# Altium PCB PCB V1.0_2024-01-11.pcbdoc
Units mm, origin at the board's own origin, x right, y up, seen from the top; angles counter-clockwise.
Board outline 120.66 x 89.41 mm, 2 copper layers (Top Layer, Bottom Layer); 58 components, 46 nets, 213 pads, 104 vias.
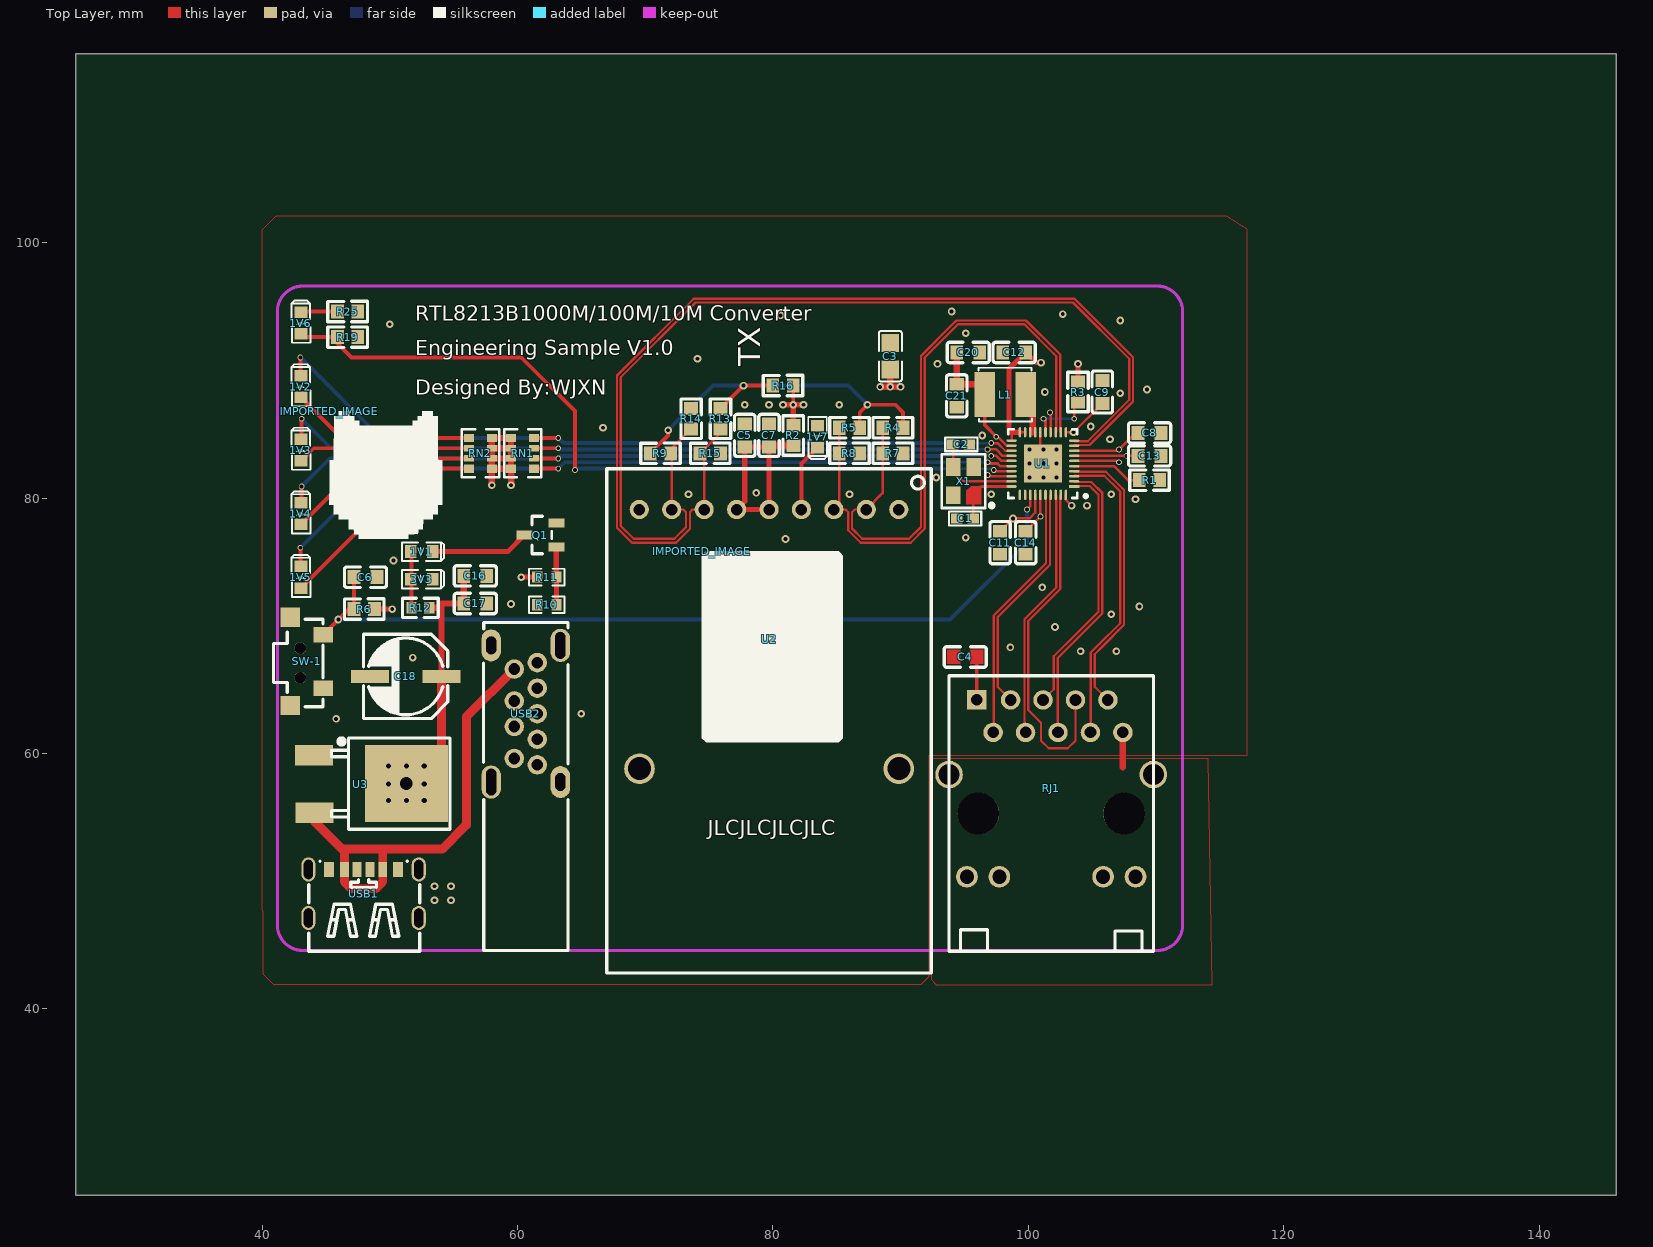
[diagram p0: Top Layer view]
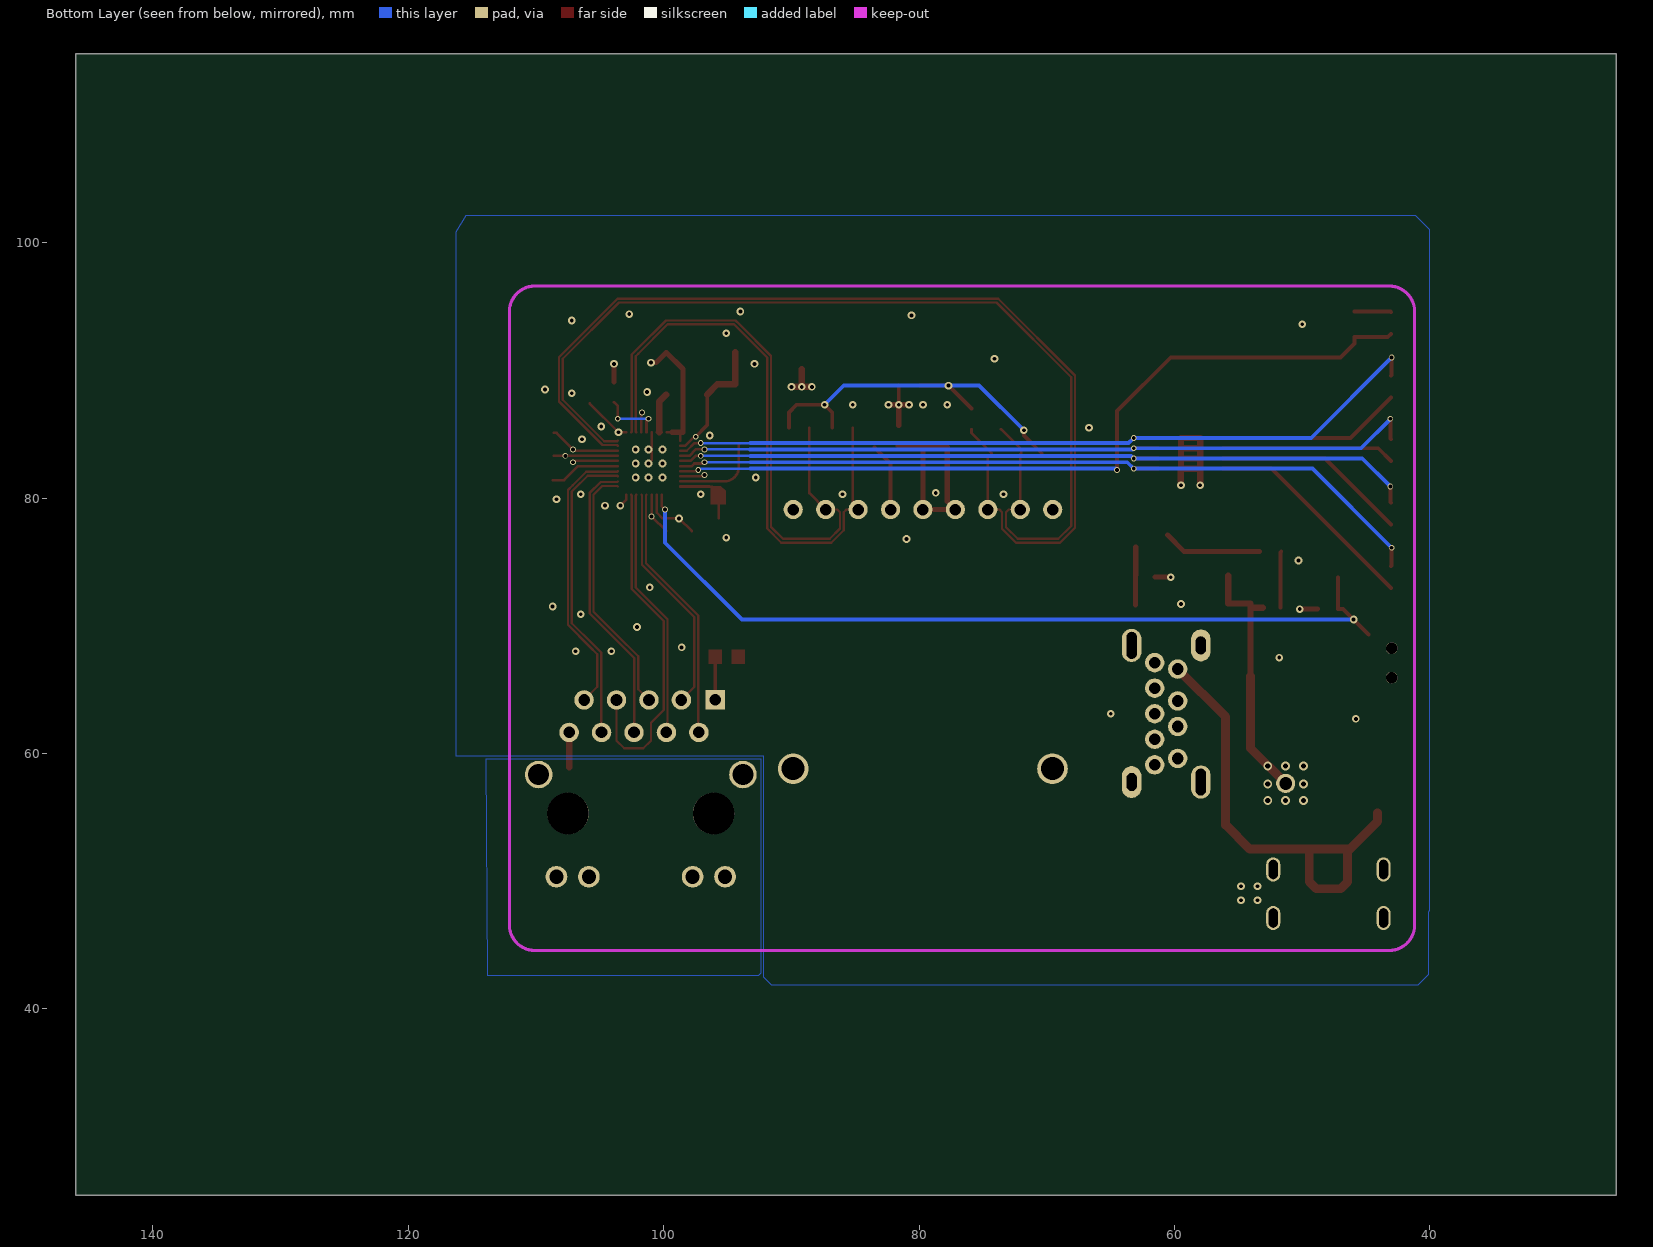
[diagram p1: Bottom Layer view, seen from below]

## Layer stack, top to bottom
Top Layer: signal copper (thickness not stored)
Dielectric: dielectric 0.32, FR-4, Dk 4.8
Bottom Layer: signal copper (thickness not stored)

## Board outline
146.057,25.4 25.4,25.4 25.4,114.812 146.057,114.812

## Components (designator, comment, footprint, x,y, rotation, side; value= is the part's Value field where it differs from the comment)
1V1 "LED-0603_R" LED0603_RED 52.5,75.812 r0 top
1V2 "LED-0603_R" LED0603_RED 43.05,88.737 r90 top
1V3 "LED-0603_R" LED0603_RED 43.05,83.762 r90 top
1V4 "LED-0603_R" LED0603_RED 43.05,78.787 r90 top
1V5 "LED-0603_R" LED0603_RED 43.05,73.812 r90 top
1V6 "LED-0603_R" LED0603_RED 43.05,93.712 r90 top
1V7 "LED-0603_R" LED0603_RED 83.5,84.812 r270 top
3V3 "LED-0603_R" LED0603_RED 52.5,73.653 r0 top
C1 "18PF" C0402 95.7,78.412 r180 top
C2 "18PF" C0402 95.4,84.212 r180 top
C3 "10u" C0805 89.2,91.112 r270 top
C4 "10nf" C0603#1 95.069,67.564 r0 top
C5 "0.1u" C0603#2 77.8,84.912 r270 top
C6 "0.1u" C0603#2 48.1,73.812 r180 top
C7 "10n" C0603#2 79.7,84.912 r270 top
C8 "100n" C0603#2 109.5,85.112 r180 top
C9 "100n" C0603#2 105.8,88.312 r270 top
C11 "100n" C0603#2 97.8,76.512 r90 top
C12 "100n" C0603#2 98.9,91.412 r0 top
C13 "100n" C0603#2 109.5,83.312 r180 top
C14 "100n" C0603#2 99.8,76.512 r90 top
C16 "0.1u" C0603#2 56.7,73.912 r180 top
C17 "10n" C0603#2 56.7,71.753 r180 top
C18 "100uF" CAP-SMD_BD6.3-L6.6-W6.6-FD 51.254,66.04 r180 top
C20 "10n" C0603#2 95.3,91.412 r180 top
C21 "0.1u" C0603#2 94.4,88.012 r90 top
IMPORTED_IMAGE "IMPORTED_IMAGE" IMPORTED_IMAGE 45.278,86.813 r0 top
IMPORTED_IMAGE "IMPORTED_IMAGE" IMPORTED_IMAGE 74.448,75.845 r0 top
L1 "2.2uH" IND-SMD_L4.0-W4.0 98.2,88.112 r180 top
Q1 "SI2302" SOT-23(SOT-23-3) 61.792,77.114 r90 top
R1 "2.5k" R0603#1 109.5,81.412 r180 top
R2 "0R" R0603#1 81.6,84.912 r270 top
R3 "4.7k" R0603#1 103.9,88.312 r90 top
R4 "82R" R0603#1 89.4,85.512 r0 top
R5 "82R" R0603#1 86,85.512 r0 top
R6 "4.7k" R0603#1 48,71.312 r0 top
R7 "130R" R0603#1 89.4,83.512 r180 top
R8 "130R" R0603#1 86,83.512 r180 top
R9 "82R" R0603#1 71.2,83.512 r180 top
R10 "10K" R0603#2 62.3,71.653 r0 top
R11 "1K" R0603#2 62.3,73.812 r0 top
R12 "1K" R0603#3 52.4,71.412 r180 top
R13 "82R" R0603#1 75.9,86.212 r90 top
R14 "130R" R0603#1 73.6,86.212 r270 top
R15 "130R" R0603#1 75.1,83.512 r180 top
R16 "0r" R0603#1 80.8,88.812 r0 top
R19 "4.7k" R0603#1 46.7,92.612 r180 top
R25 "470R" R0603#1 46.7,94.612 r180 top
RJ1 "HR911130A" RJ45-TH_HR911130A 101.8,57.277 r180 top
RN1 "4.7k" RES-ARRAY-SMD_0603-8P-L3.2-W1.6-BL 60.4,83.512 r270 top
RN2 "470R" RES-ARRAY-SMD_0603-8P-L3.2-W1.6-BL 57.1,83.512 r270 top
SW-1 "TS-1101VS-C-A-A" KEY-SMD_4P-L7.8-W2.8-P4.20-EH 43.5,67.212 r90 top
U1 "RTL8213B" QFN40_5*5*0.4 103.6,80.912 r180 top
U2 "1*9-SC" 1*9-SC 79.702,68.961 r90 top
U3 "UZ1084G-3.3V-TN3-R" TO-252-3_L6.5-W5.8-P4.58-TL 47.7,57.612 r0 top
USB1 "TYPE-C 6P" TYPE-C-SMD_TYPE-C-6P 47.952,49.022 r0 top
USB2 "U231-091N-4BLCC14-F-5" USB3.0-A-TH_U231-091N-4BLCC14-S-5 60.652,63.119 r0 top
X1 "25MHz" OSC-SMD_4P-L3.2-W2.5-BL 94.933,81.327 r90 top

## Footprints (in the part's own frame and the unit in brackets; to place one, negate y for a bottom-side part, rotate by r counter-clockwise, add the part's x,y. Pads: shape width x height; smd on the part's side, far side on the other; paste and mask are expansions set on the pad)
1*9-SC [mm]
  round 1.5 hole 0.9 paste+0 mask+0.102: 1(10.15,-10.16) 2(10.15,-7.62) 3(10.15,-5.08) 4(10.15,-2.54) 5(10.15,0) 6(10.15,2.54) 7(10.15,5.08) 8(10.15,7.62) 9(10.15,10.16)
  round 2.4 hole 1.8 paste+0 mask+0.102: 10(-10.15,10.14) 11(-10.15,-10.16)
  silkscreen extent -26.15,-12.7 13.35,12.7
C0402 [mil]
  rect 35.4x31.5 smd paste+0 mask+4: 1(0,0) 2(51.2,0)
  silkscreen extent -24,-22 75,21
C0603#1 [mm]
  Top Layer region: 1.4,0.55 1.4,-0.55 0.4,-0.55 0.4,0.55
  Top Layer region: -0.4,-0.55 -1.4,-0.55 -1.4,0.55 -0.4,0.55
  silkscreen extent -1.65,-0.8 1.65,0.8
C0603#2 [mm]
  rect 1x1.1 smd paste+0 mask+0.102: 1(-0.9,0) 2(0.9,0)
  silkscreen extent -1.65,-0.8 1.65,0.8
C0805 [mm]
  rect 1.41x1.35 smd paste-100 mask+0.051: 1(-1.03,0) 2(1.03,0)
  silkscreen extent -1.96,-0.9 1.96,0.9
CAP-SMD_BD6.3-L6.6-W6.6-FD [mm]
  rect 3x1 smd paste+0 mask+0.102: 1(-2.8,0) 2(2.8,0)
  silkscreen extent -3.3,-3.3 3.3,3.3
IMPORTED_IMAGE [mm]
  silkscreen extent 0,-10 8.84,0
IND-SMD_L4.0-W4.0 [mm]
  rect 1.6x3.5 smd paste+0 mask+0.051: 1(-1.6,0) 2(1.6,0)
  silkscreen extent -2.08,-2.1 2.08,2.1
KEY-SMD_4P-L7.8-W2.8-P4.20-EH [mil]
  rect 47.24x60 smd paste+0 mask+2: 1(-82.7,-51.15) 2(82.7,-51.15)
  rect 60x60 smd paste+0 mask+2: 3(-135.8,51.15) 4(135.8,51.15)
  round 35.43 hole 35.43 unplated paste+0: ""(-50,19.95) ""(40.55,19.95)
  silkscreen extent -140,-50 130,103
LED0603_RED [mm]
  rect 0.9x1 smd paste+0 mask+0.051: 1(-0.85,0) 2(0.85,0)
  silkscreen extent -1.54,-0.73 1.75,0.73
OSC-SMD_4P-L3.2-W2.5-BL [mm]
  rect 1.4x1.15 smd paste+0 mask+0.102: 2(1.1,-0.8) 3(1.1,0.8) 4(-1.1,0.8)
  Top Layer region: -1.8,-0.225 -0.762,-0.225 -0.4,-0.604 -0.4,-1.375 -1.8,-1.375
  silkscreen extent -2.1,-2.35 2.1,1.7
QFN40_5*5*0.4 [mm]
  rect 0.8x0.2 smd paste+0 mask+0.102: 1(0,0)
  oval 0.8x0.2 smd paste+0 mask+0.102: 2(0,-0.4) 3(0,-0.8) 4(0,-1.2) 5(0,-1.6) 6(0,-2) 7(0,-2.4) 8(0,-2.8) 9(0,-3.2) 10(0,-3.6) 21(4.9,-3.6) 22(4.9,-3.2) 23(4.9,-2.8) 24(4.9,-2.4) 25(4.9,-2) 26(4.9,-1.6) 27(4.9,-1.2) 28(4.9,-0.8) 29(4.9,-0.4) 30(4.9,0)
  oval 0.2x0.8 smd paste+0 mask+0.102: 11(0.65,-4.25) 12(1.05,-4.25) 13(1.45,-4.25) 14(1.85,-4.25) 15(2.25,-4.25) 16(2.65,-4.25) 17(3.05,-4.25) 18(3.45,-4.25) 19(3.85,-4.25) 20(4.25,-4.25) 31(4.25,0.65) 32(3.85,0.65) 33(3.45,0.65) 34(3.05,0.65) 35(2.65,0.65) 36(2.25,0.65) 37(1.85,0.65) 38(1.45,0.65) 39(1.05,0.65) 40(0.65,0.65)
  rect 3x3 smd paste+0 mask+0.102: 41(2.45,-1.8)
  silkscreen extent -1.03,-4.5 5.15,0.9
R0603#1 [mm]
  rect 1x1.1 smd paste+0 mask+0.102: 1(-0.8,0) 2(0.8,0)
  silkscreen extent -1.55,-0.8 1.55,0.81
R0603#2 [mm]
  rect 0.806x0.864 smd paste-100 mask+0.051: 1(-0.753,0) 2(0.753,0)
  silkscreen extent -1.39,-0.66 1.39,0.66
R0603#3 [mm]
  rect 0.8x0.9 smd paste+0 mask+0.102: 1(-0.7,0) 2(0.7,0)
  silkscreen extent -1.4,-0.75 1.4,0.76
RES-ARRAY-SMD_0603-8P-L3.2-W1.6-BL [mm]
  rect 0.65x0.8 smd paste+0 mask+0.051: 1(-1.2,-0.9) 4(1.2,-0.9) 5(1.2,0.9) 8(-1.2,0.9)
  rect 0.5x0.8 smd paste+0 mask+0.051: 2(-0.4,-0.9) 3(0.4,-0.9) 6(0.4,0.9) 7(-0.4,0.9)
  silkscreen extent -1.87,-1.45 1.87,1.47
RJ45-TH_HR911130A [mil]
  round 66.93 hole 43.31 paste+0 mask+2: 11(260,272.62) 12(160,272.62) 13(-160,272.62) 14(-260,272.62)
  rect 60x60 hole 35.83 paste+0 mask+2: P1(229.63,-272.62)
  round 60 hole 35.83 paste+0 mask+2: P2(179.1,-172.38) P3(125.2,-272.38) P4(79.1,-172.38) P5(25.2,-272.38) P6(-20.9,-172.38) P7(-74.8,-272.38) P8(-120.9,-172.38) P9(-174.8,-272.38) P10(-220.9,-172.38)
  round 85 hole 65 paste+0 mask+2: SHIELD0(-315,-42.48) SHIELD1(315,-42.48)
  round 127.95 hole 127.95 unplated paste+0: ""(-224.4,77.62) ""(224.4,77.62)
  silkscreen extent -315,-347 315,503
SOT-23(SOT-23-3) [mm]
  rect 0.7x1.25 smd paste+0 mask+0.102: 1(-0.95,-1.25) 2(0.95,-1.25) 3(0,1.25)
  silkscreen extent -1.46,-0.9 1.46,0.65
TO-252-3_L6.5-W5.8-P4.58-TL [mm]
  rect 3x1.6 smd paste+0 mask+0.051: 1(-3.628,2.26) 3(-3.599,-2.26)
  rect 6.5x6 smd paste+0 mask+0.051: 2(3.628,0.039)
  silkscreen extent -2.27,-3.54 7.02,3.61
TYPE-C-SMD_TYPE-C-6P [mm]
  oval 1.1x1.9 hole 0.7 slot 1.5 at 90 deg paste+0 mask+0.051: 7(-4.32,-1.9) 7(-4.32,1.9) 7(4.32,-1.9) 7(4.32,1.9)
  rect 0.7x1.2 smd paste+0 mask+0.051: A5(-0.5,1.9) A9(1.5,1.9) B5(0.5,1.9) B9(-1.5,1.9)
  rect 0.8x1.2 smd paste+0 mask+0.051: A12(2.7,1.9) B12(-2.7,1.9)
  silkscreen extent -4.3,-4.5 4.4,2.55
USB3.0-A-TH_U231-091N-4BLCC14-S-5 [mil]
  round 60 hole 36 paste+0 mask+2: 1(-35.43,137.8) 2(-35.43,39.37) 3(-35.43,-39.37) 4(-35.43,-137.8) 5(35.43,-157.48) 6(35.43,-78.74) 7(35.43,0) 8(35.43,78.74) 9(35.43,157.48)
  oval 60x102.36 hole 31.5 slot 82.68 at 90 deg paste+0 mask+2: 10(-106.69,-210.63) 10(106.7,210.63)
  oval 60x98.42 hole 31.5 slot 55.12 at 90 deg paste+0 mask+2: 10(-106.69,210.63) 10(106.7,-210.63)
  silkscreen extent -130,-730 130,281

## Free pads (board coordinates)
  round 1.5 hole 1 paste+0 mask+0.102: 1(51.3,57.662)

## Via types
v1: diameter 0.6, hole 0.3, Top Layer to Bottom Layer, tented both sides, 70 vias
v2: diameter 0.45, hole 0.3, Top Layer to Bottom Layer, tented both sides, 24 vias
v3: diameter 0.7, hole 0.4, Top Layer to Bottom Layer, tented both sides, 8 vias
v4: diameter 0.61, hole 0.305, Top Layer to Bottom Layer, tented both sides, 2 vias

## Nets (pads, with @x,y where several pads share a name; then routed paths per layer and width w, separated by ;. In a path a pad name is that pad's centre, name@x,y a point inside that pad or via, vN(x,y) a via of type N, cw(c..) or ccw(c..) an arc to the next point about the centre after c; other vN are vias at no path point)
1V0: C3.2 C8.2 C9.2 C11.2 C20.2 C21.2 L1.2 R11.1 U1.6 U1.8 U1.11 U1.22 U1.34 U1.40 | length 68.2
  Top Layer w0.2: v2(97.5,84.812) 97.6,84.812 98.3,84.112 U1.22 ; C11.2 v1(98.8,78.412) 100.101,78.412 100.55,78.862 U1.34 ; U1.40 102.95,79.862 v1(103.4,79.412) ; U1.11 v1(103.55,85.162) C9.2 ; U1.6 107,82.912 v2(107.1,82.812) ; U1.8 107,83.712 v2(107.1,83.812) 108.4,85.112 C8.2
  Top Layer w0.3: L1.2 96.6,85.712 v2@97.5,84.812
  Top Layer w0.4: v1(60.3,73.812) R11.1
  Top Layer w0.5: v1(88.4,88.712) v1(90,88.712) ; v1(89.2,88.712) C3.2 ; C20.2@94.401,91.412 94.401,88.913 95.8,88.912 L1.2
  Mid-Layer 1 w0.4: v1(60.3,73.812) 64.6,73.812 87.9,73.812 93.2,79.112
1V1_2: 1V1.2 Q1.3 | length 7.7
  Top Layer w0.4: 1V1.2 59.24,75.812 Q1.3
1V2_1: 1V2.1 RN2.1 | length 14.5
  Top Layer w0.3: 1V2.1 46.225,84.712 RN2.1
1V3_1: 1V3.1 RN2.2 | length 13.6
  Top Layer w0.3: 1V3.1 44.05,83.912 RN2.2
1V4_1: 1V4.1 RN2.3 | length 15.3
  Top Layer w0.3: 1V4.1 48.225,83.112 RN2.3
1V5_1: 1V5.1 RN2.4 | length 17
  Top Layer w0.3: 1V5.1 52.4,82.312 RN2.4
1V6_2: 1V6.2 R25.2 | length 2.9
  Top Layer w0.3: 1V6.2 43.1,94.612 R25.2
3V3: C12.2 C13.2 C14.2 C16.2 C17.2 C18.1 pad.1 R2.1 R3.2 R6.2 R12.1 R16.2 RN1.1 RN1.2 RN1.3 RN1.4 RN2.5 RN2.6 RN2.7 RN2.8 U1.7 U1.14 U1.19 U1.20 U1.21 U1.28 U1.35 U3.2 | length 64.6
  Top Layer w0.2: v2(96.8,81.812) 96.9,81.712 U1.28 ; 98.5,85.161 98.701,85.161 U1.21@98.701,84.511 ; U1.20 U1.19 ; C14.2 v2(100.95,78.562) U1.35 ; v2(101.7,86.712) 101.75,86.662 U1.14 ; U1.7 v2(107.705,83.312) C13.2
  Top Layer w0.3: v1(81.6,87.312) R16.2
  Top Layer w0.4: R6.2 v1(50.2,71.312) ; v1(80.8,87.312) v1(81.6,87.312) ; R2.1 v1(81.6,87.312) ; v1(82.4,87.312) v1(81.6,87.312) ; U1.20 98.5,85.161 98.5,90.112 99.801,91.412 100.601,90.612 v1(101,90.612) ; R3.2@103.9,89.112 v1(103.9,90.512)
  Top Layer w0.5: R12.1@53.101,71.412 54.053,71.412 54.053,70.007 ; C18.1 54.053,71.752 55.801,71.752 C16.2 ; v1(58,81.012) RN2.5 ; RN2.6@58,83.091 RN1.3 ; RN2.7 RN1.2 ; v1(59.5,81.012) RN1.4 ; RN2.5 RN2.8 RN1.1 RN1.4 ; RN2.5 RN1.4
  Top Layer w0.7: pad.1 54.054,60.416 C18.1
  other v3: 49.9,56.312 51.3,56.312 52.7,56.312 49.9,57.612 52.7,57.612 49.9,59.012 51.3,59.012 52.7,59.012
GND: 1V7.1 3V3.2 C1.2 C2.1 C3.1 C5.1 C6.1 C7.1 C8.1 C9.1 C11.1 C12.1 C13.1 C14.1 C16.1 C17.1 C18.2 C20.1 C21.1 Q1.2 R1.1 R7.1 R8.1 R10.1 R14.1 R15.1 R19.1 R25.1 SW-1.1 U1.16 U1.41 U2.1 U2.9 U3.1 USB1.7 USB1.A12 USB1.B12 USB2.4 USB2.7 X1.2 X1.4 | length 2.6
  Top Layer w0.2: U1.16 100.95,82.962 v1(101.2,82.712)
  other v1: 53.5,48.512 54.8,48.512 53.5,49.612 54.8,49.612 45.8,62.712 65,63.112 51.8,67.512 104.1,68.012 106.9,68.012 98.6,68.312 102.1,69.912 106.5,70.912 108.7,71.512 59.5,71.712 101.1,73.012 50.3,75.112 95.1,76.912 104.6,79.412 108.4,79.912 73.4,80.312 86,80.312 97.1,80.312 106.5,80.312 78.7,80.412 92.8,81.612 100.1,81.612 101.2,81.612 102.2,81.612 100.1,82.712 102.2,82.712 100.1,83.812 101.2,83.812 102.2,83.812 106.4,84.612 96.4,84.912 66.7,85.512 104.9,85.612 77.8,87.312 85.2,87.312 107.2,88.212 101.3,88.312 109.3,88.512 92.9,90.512 74.1,90.912 95.1,92.912 50,93.612 107.2,93.912 80.6,94.312 102.7,94.412 94,94.612
  other v4: 81,76.812 79.7,87.312
HSI_N: R5.1 R8.2 U1.13 U2.3 | length 47.8
  Top Layer w0.178: U2.3 85.686,79.111 85.899,78.897 85.899,77.881 85.899,77.489 86.877,76.512 88.8,76.512 90.4,76.512 90.792,76.512 91.9,77.62 91.9,80.812 91.9,91.012 94.4,93.512 94.502,93.614 99.698,93.614 102,91.312 102.197,91.115 102.197,86.225 102.197,85.209 U1.13
  Top Layer w0.2: U2.3 85.2,79.529 R5.1
HSI_P: R4.1 R7.2 U1.12 U2.2 | length 48.2
  Top Layer w0.178: U2.2 86.418,79.111 86.204,78.897 86.204,77.881 86.204,77.616 87.003,76.817 88.8,76.817 90.4,76.817 90.666,76.817 91.595,77.746 91.595,80.812 91.595,91.138 94.095,93.638 94.375,93.919 99.825,93.919 102.126,91.617 102.502,91.241 102.502,86.225 102.502,85.209 U1.12
  Top Layer w0.2: U2.2 88.6,80.389 R4.1
HSO_N: R13.1 R15.2 U1.9 U2.7 | length 82.5
  Top Layer w0.178: U2.7 73.718,79.111 73.504,78.897 73.504,77.602 72.41,76.507 68.973,76.507 67.794,77.688 67.794,89.606 73.807,95.618 103.624,95.618 108.206,91.036 108.206,87.577 104.79,84.16 103.647,84.16 U1.9@103.601,84.112
  Top Layer w0.2: U2.7 74.622,83.19 R15.2 75.9,85.112 R13.1
HSO_P: R9.1 R14.2 U1.10 U2.8 | length 79.8
  Top Layer w0.178: U2.8 72.986,79.111 73.2,78.897 73.2,77.729 72.283,76.812 69.1,76.812 68.099,77.813 68.099,89.461 73.951,95.313 103.499,95.313 107.901,90.912 107.901,87.704 104.663,84.465 103.647,84.465 U1.10@103.601,84.511
  Top Layer w0.2: U2.8 72.082,83.43 R9.1 72,83.812 R14.2
P3A_RJ45_N: RJ1.P3 U1.37 | length 18.2
  Top Layer w0.178: RJ1.P3 97.605,65.21 97.605,66.112 97.605,70.686 99.405,72.486 101.703,74.783 101.703,79.198 101.703,80.214 U1.37
P3A_RJ45_P: RJ1.P2 U1.36 | length 20.3
  Top Layer w0.178: RJ1.P2 97.3,61.705 97.3,66.112 97.3,70.812 99.1,72.612 101.398,74.91 101.398,79.198 101.398,80.214 U1.36
P3B_RJ45_N: RJ1.P7 U1.39 | length 27.1
  Top Layer w0.178: 101,62.413 101,61.011 101.602,60.411 103.1,60.411 103.7,61.011 RJ1.P7 ; 101,62.412 100.005,63.407 100.005,64.212 100.005,70.386 101.305,71.686 102.502,72.883 102.502,79.198 102.502,80.214 U1.39
P3B_RJ45_P: RJ1.P4 U1.38 | length 19.7
  Top Layer w0.178: RJ1.P4 99.7,61.746 99.7,64.212 99.7,70.512 101,71.812 102.197,73.009 102.197,79.198 102.197,80.214 U1.38
P3C_RJ45_N: RJ1.P6 U1.2 | length 22.8
  Top Layer w0.178: RJ1.P6 102.305,61.681 102.305,66.112 102.305,67.486 104.005,69.186 105.805,70.986 105.805,78.212 105.805,80.402 104.942,81.265 104.664,81.265 103.648,81.265 U1.2
P3C_RJ45_P: RJ1.P5 U1.1 | length 20.1
  Top Layer w0.178: RJ1.P5 102,65.036 102,66.112 102,67.612 103.7,69.312 105.5,71.112 105.5,78.212 105.5,80.275 104.816,80.96 104.664,80.96 103.648,80.96 U1.1
P3D_RJ45_N: RJ1.P9 U1.4 | length 22.3
  Top Layer w0.178: U1.4 103.647,82.065 104.663,82.065 106.079,82.065 107.126,81.017 107.505,80.638 107.505,76.912 107.505,70.086 105.805,68.386 105.205,67.786 105.205,66.112 105.205,65.23 RJ1.P9
P3D_RJ45_P: RJ1.P8 U1.3 | length 24
  Top Layer w0.178: U1.3 103.647,81.76 104.663,81.76 105.953,81.76 107,80.712 107.2,80.512 107.2,76.912 107.2,70.212 105.5,68.512 104.9,67.912 104.9,66.112 104.9,61.685 RJ1.P8
R4_2: R4.2 R5.2 R9.2 R13.2 R16.1 | length 31.2
  Top Layer w0.3: R9.2 71.8,84.912 v1(71.8,85.312) ; R13.2 v1(77.7,88.812) R16.1 ; R5.2@86.801,85.512 86.801,86.713 v1(87.401,87.312) 89.6,87.312 90.2,86.713 R4.2
  Bottom Layer w0.3: v1(71.8,85.312) 75.3,88.812 v1(77.7,88.812) 85.901,88.812 v1(87.401,87.312)
R11_2: Q1.1 R10.2 R11.2 | length 4.5
  Top Layer w0.4: Q1.1 R10.2
R12_2: 1V1.1 3V3.1 R12.2 | length 4.4
  Top Layer w0.3: 1V1.1 51.7,75.762 R12.2
RJ1_11: RJ1.11
RJ1_12: RJ1.12
RJ1_13: RJ1.13
RJ1_14: RJ1.14
RJ1_P1: RJ1.P1 | length 3.4
  Top Layer w0.3: RJ1.P1@95.968,64.201 95.968,67.564
RST: C6.2 R6.1 SW-1.2 U1.33 | length 66
  Top Layer w0.2: v2(99.9,79.112) 100.15,79.362 U1.33
  Top Layer w0.3: SW-1.2 v1(45.979,70.492) 46.799,71.312 R6.1 ; R6.1 C6.2
  Bottom Layer w0.3: v1(45.979,70.492) 93.88,70.493 99.9,76.512 v2(99.9,79.112)
SCVCC: C5.2 C7.2 R2.2 U2.5 U2.6 | length 16.4
  Top Layer w0.4: C7.2 U2.5 U2.6 77.8,79.749 C5.2 C7.2
  Top Layer w0.5: C7.2 79.798,84.112 R2.2
SD: 1V7.2 U2.4 | length 5.4
  Top Layer w0.3: U2.4 82.242,82.705 1V7.2
SHIELD: RJ1.P10 RJ1.SHIELD0 RJ1.SHIELD1 | length 2.7
  Top Layer w0.5: 107.401,58.913 RJ1.P10
SW-1_3: SW-1.3
SW-1_4: SW-1.4
U1_5: R1.2 U1.5 | length 5.6
  Top Layer w0.2: U1.5@103.601,82.512 106.7,82.512 107.799,81.412 R1.2@108.701,81.412
U1_15: R3.1 U1.15 | length 4.9
  Top Layer w0.2: v2(101.2,86.212) 101.35,86.062 U1.15 ; v2(103.6,86.212) 103.6,87.212 R3.1
  Bottom Layer w0.2: v2(101.2,86.212) v2(103.6,86.212)
U1_17: L1.1 U1.17 U1.18 | length 3.6
  Top Layer w0.2: U1.18 U1.17
  Top Layer w0.5: L1.1 100.345,87.567 100.345,85.162
U1_23: 1V2.2 RN1.8 U1.23 | length 62.1
  Top Layer w0.2: v2(97.1,84.312) 97.6,84.312 98.2,83.712 U1.23
  Top Layer w0.3: v2(43,91.012) 43,89.637 1V2.2 ; RN1.8 v2(63.2,84.712)
  Bottom Layer w0.2: 93.2,84.312 v2(97.1,84.312)
  Bottom Layer w0.3: v2(43,91.012) 49.3,84.712 v2(63.2,84.712) 63.6,84.312 93.2,84.312
U1_24: 1V3.2 RN1.7 U1.24 | length 60.4
  Top Layer w0.2: v2(96.8,83.812) 97.5,83.812 98,83.312 U1.24
  Top Layer w0.3: 1V3.2 43.1,84.662 v2(43.1,86.212) ; RN1.7 v2(63.2,83.912)
  Bottom Layer w0.2: 93.2,83.812 v2(96.8,83.812)
  Bottom Layer w0.3: v2(43.1,86.212) 45.4,83.912 v2(63.2,83.912) 63.3,83.812 93.249,83.812
U1_25: 1V4.2 RN1.6 U1.25 | length 60
  Top Layer w0.2: v2(97.1,83.312) 97.5,83.312 97.9,82.912 U1.25
  Top Layer w0.3: 1V4.2 43.1,79.687 v2(43.1,80.912) ; RN1.6 v2(63.2,83.112)
  Bottom Layer w0.2: 93.2,83.312 v2(97.1,83.312)
  Bottom Layer w0.3: v2(43.1,80.912) 45.3,83.112 v2(63.2,83.112) 63.4,83.312 93.2,83.312
U1_26: 1V5.2 RN1.5 U1.26 | length 62
  Top Layer w0.2: v2(96.8,82.812) 96.9,82.712 97.6,82.712 97.8,82.512 U1.26
  Top Layer w0.3: v2(43,76.112) 43,74.712 1V5.2 ; RN1.5 v2(63.2,82.312)
  Bottom Layer w0.2: 93.2,82.812 v2(96.8,82.812)
  Bottom Layer w0.3: v2(43,76.112) 49.2,82.312 v2(63.2,82.312) 63.7,82.812 93.2,82.812
U1_27: 1V6.1 R19.2 U1.27 | length 63.2
  Top Layer w0.2: v2(97.3,82.212) 97.4,82.112 U1.27@98.7,82.112
  Top Layer w0.3: 1V6.1 43.3,92.612 R19.2 45.9,92.112 47,91.012 60.3,91.012 64.5,86.812 v2(64.5,82.212)
  Bottom Layer w0.2: 93.2,82.312 97.2,82.312 v2(97.3,82.212)
  Bottom Layer w0.3: v2(64.5,82.212) 64.6,82.312 93.2,82.312
VBUS: U3.3 USB1.A9 USB1.B9 USB2.1 | length 37.1
  Top Layer w0.7: U3.3 44.101,54.712 46.453,52.36 46.453,51.864 ; USB2.1@59.753,66.619 56.001,62.868 56.001,54.412 54.101,52.512 49.453,52.512 ; 49.453,52.512 46.453,52.512 46.453,50.922 46.453,49.959 46.999,49.413 48.899,49.413 49.453,49.964 49.453,50.922 49.453,52.512
XTALI: C1.1 U1.30 | length 5.2
  Top Layer w0.2: C1.1 95.7,80.194 95.733,80.227 cw(c96.418,80.227) 96.418,80.912 U1.30
XTALO: C2.2 U1.29 X1.3 | length 7
  Top Layer w0.2: C2.2 94.133,84.179 X1.3 ccw(c95.248,82.427) 95.248,81.312 U1.29
pads on no net: RJ1. SW-1. U1.31 U1.32 U2.10 U2.11 USB1.A5 USB1.B5 USB2.2 USB2.3 USB2.5 USB2.6 USB2.8 USB2.9 USB2.10
copper on no net: | length 0

## Polygon pours and split planes (outlines as drawn)
SHIELD on Bottom Layer (solid): 113.9,59.612 92.4,59.612 92.4,42.812 92.6,42.612 113.8,42.612
GND on Bottom Layer (solid): 116.3,100.812 116.3,59.812 109.8,59.812 95.9,59.812 92.2,59.812 92.2,54.512 92.2,43.612 92.2,42.512 91.6,41.912 88.8,41.912 41.9,41.912 40.9,41.912 40.1,42.712 40.1,47.612 40,47.712 40,97.812 40,101.012 41.1,102.112 115.5,102.112
3V3 on Mid-Layer 2 (solid): 39.7,98.912 40.9,100.112 115.1,100.112 115.7,99.512 115.5,70.912 114.1,70.612 92.4,70.612 66.2,70.612 56.1,70.612 56.1,58.312 56.1,52.912 38.1,52.912
GND on Mid-Layer 2 (solid): 118.4,101.612 118.3,59.812 109.8,59.812 95.9,59.812 92.2,59.812 92.2,54.512 92.2,43.612 92.2,42.512 91.6,41.912 88.8,41.912 41.9,41.912 40.9,41.912 40.1,42.712 40.1,47.612 40,47.712 40,97.812 40,101.012 41.1,102.112 115.5,102.112
1V0 on Mid-Layer 1 (solid): 86.9,98.612 113.7,98.912 114.5,98.112 114.5,75.712 92.4,75.712 92.4,78.312 92.4,82.312 92.3,82.412 84,82.412 84,98.012
GND on Mid-Layer 1 (solid): 117.8,101.312 117.7,59.812 109.8,59.812 95.9,59.812 92.2,59.812 92.2,54.512 92.2,43.612 92.2,42.512 91.6,41.912 88.8,41.912 41.9,41.912 40.9,41.912 40.1,42.712 40.1,47.612 40,47.712 40,97.812 40,101.012 41.1,102.112 115.5,102.112
SHIELD on Top Layer (solid): 114.1,59.612 92.4,59.612 92.4,42.312 92.8,41.912 114.4,41.912
GND on Top Layer (solid): 117.1,101.112 117.1,59.812 109.8,59.812 95.9,59.812 92.2,59.812 92.2,54.512 92.2,43.612 92.2,42.512 91.6,41.912 88.8,41.912 41.9,41.912 40.9,41.912 40.1,42.712 40.1,47.612 40,47.712 40,97.812 40,101.012 41.1,102.112 115.5,102.112

## Keep-outs
Keep-Out Layer:
  lines w0.254: 41.201,46.577 ccw(c43.201,46.577) 43.201,44.577 ; 41.201,94.611 cw(c43.201,94.611) 43.201,96.611 ; 110.087,44.577 ccw(c110.087,46.577) 112.087,46.577 ; 110.087,96.611 cw(c110.087,94.611) 112.087,94.611

## Silkscreen, mask and mechanical layers (free items; w line width, h text height)
Top Overlay:
  text "RTL8213B" at 52,93.513 h2
  text "1000M/100M/10M Converter" at 60.2,93.512 h2
  text "Engineering Sample V1.0" at 52,90.784 h2
  text "TX" at 79.6,90.312 h3 r90
  text "Designed By:WJXN" at 52,87.712 h2
  text "JLCJLCJLCJLC" at 74.9,53.212 h2
Document:
  text "差分：0.178/0.178" at 119.1,68.312 h2.03 r359
  text "孔：0.45/0.3" at 121.3,65.612 h2.03 r359
  text "5mm" at 51.381,38.481 h2.03
  text "3mm" at 62.43,38.1 h2.03